# Altium PCB Mo04E_u2.PcbDoc
Units mm, origin at the board's own origin, x right, y up, seen from the top; angles counter-clockwise.
Board outline 91.2 x 38.05 mm, 2 copper layers (Top Layer, Bottom Layer); 55 components, 51 nets, 201 pads, 0 vias.
Unrouted connection lines stored in the file: 124.
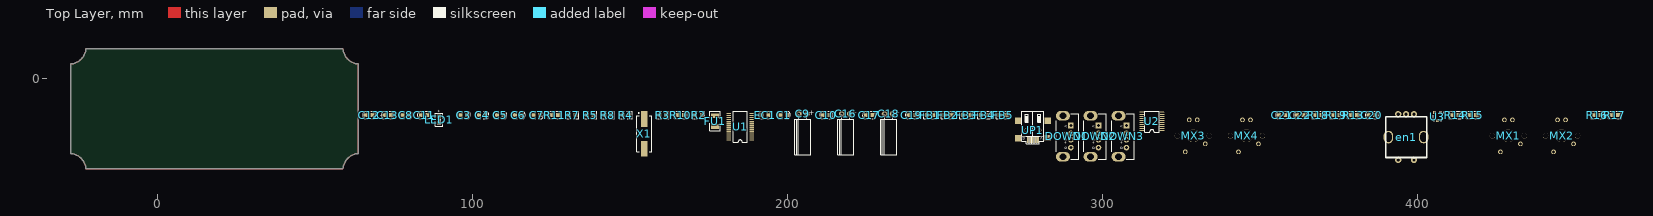
[diagram p0: Top Layer view]
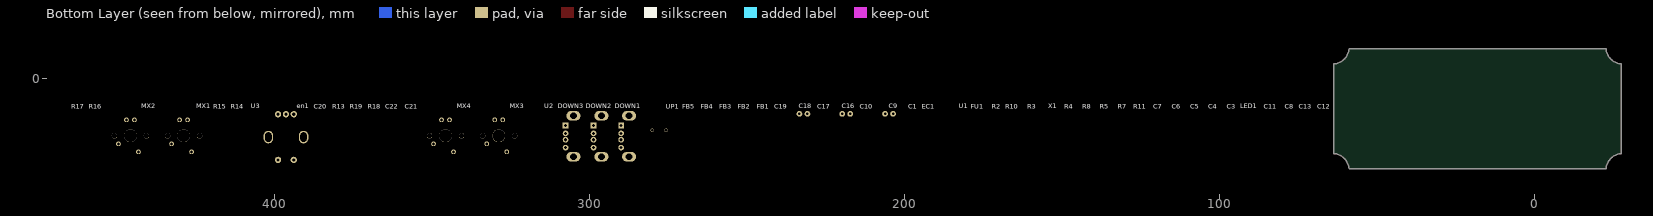
[diagram p1: Bottom Layer view, seen from below]

## Layer stack, top to bottom
Top Solder: solder mask 0.0102, Solder Resist, Dk 3.5
Top Layer: signal copper 0.0356
Dielectric 1: dielectric 0.32, FR-4, Dk 4.8
Bottom Layer: signal copper 0.0356
Bottom Solder: solder mask 0.0102, Solder Resist, Dk 3.5

## Board outline
-27.551,-23.745 -27.551,4.696 ccw(c-28.051,10.001) -22.746,9.501 58.845,9.501 ccw(c64.15,10.001) 63.65,4.696 63.65,-23.745 ccw(c64.15,-29.05) 58.845,-28.55 -22.746,-28.55 ccw(c-28.051,-29.05)

## Design rules (kind name [scope] priority, off if disabled: settings)
Clearance [All] p1: gap=0.254
PolygonConnect [All] p1: connectstyle=Relief reliefconductorwidth=0.254 reliefentries=4 polygonreliefangle="90 Angle" airgapwidth=0.254
RoomDefinition Sheet1 [InComponentClass('Sheet1')] p1: confinementstyle=ConfineIn formatcopy=TRUE lockcomponents=FALSE outline 64.754,-27.018 465.058,-27.018 465.058,-7.46 64.754,-7.46
RoutingVias [All] p1: holewidth=0.711 width=1.27 viastyle="Through Hole" minholewidth=0.711 minwidth=1.27 maxholewidth=0.711 maxwidth=1.27
SolderMaskExpansion [All] p1: expansion=0.102
Width [All] p1: maxlimit=0.254 minlimit=0.254 preferedwidth=0.254
30 further rules are at their usual default settings.

## Components (designator, comment, footprint, x,y, rotation, side; value= is the part's Value field where it differs from the comment)
C1 "100nf" C0805 200.009,-11.524 r180 top
C3 "0.1uF" C0805 98.409,-11.524 r180 top
C4 "0.1uF" C0805 104.251,-11.524 r180 top
C5 "0.1uF" C0805 109.966,-11.524 r180 top
C6 "0.1uF" C0805 115.808,-11.524 r180 top
C7 "0.1uF" C0805 121.65,-11.524 r180 top
C8 "0.1uF" C0805 79.994,-11.524 r180 top
C9 "100uf" "CAP-E 2.5MM-5X10" 206.232,-11.143 r180 top
C10 "0.1uf" C0805 213.598,-11.524 r180 top
C11 "0.1uF" C0805 85.836,-11.524 r180 top
C12 "20pF" C0805 68.437,-11.524 r180 top
C13 "20pF" C0805 74.279,-11.524 r180 top
C16 "100uf" "CAP-E 2.5MM-5X10" 219.821,-11.143 r180 top
C17 "0.1uf" C0805 227.187,-11.524 r180 top
C18 "100uf" "CAP-E 2.5MM-5X10" 233.41,-11.143 r180 top
C19 "0.1uf" C0805 240.776,-11.524 r180 top
C20 "0.1uF" C0805 386.826,-11.524 r180 top
C21 "0.1uF" C0805 358.378,-11.524 r180 top
C22 "0.1uF" C0805 364.093,-11.524 r180 top
DOWN1 "USB" USB-A/S_D 288.782,-18.255 r270 top
DOWN2 "USB" USB-A/S_D 297.545,-18.255 r270 top
DOWN3 "USB" USB-A/S_D 306.435,-18.255 r270 top
EC1 "10uf" C0805 194.167,-11.524 r180 top
en1 "encoder" "RES ADJ-EC12" 396.478,-18.509 r180 top
FB1 "" R0805 246.364,-11.524 r180 top
FB2 "" R0805 251.952,-11.524 r180 top
FB3 "" R0805 257.794,-11.524 r180 top
FB4 "" R0805 263.636,-11.524 r180 top
FB5 "" R0805 269.478,-11.524 r180 top
FU1 "6V/2A" FUSE-F1210 177.022,-13.429 r270 top
LED1 "" LED0805 89.392,-12.032 r270 top
MX1 "" MX_SW-5 428.99,-18.128 r180 top
MX2 "" MX_SW-5 445.881,-18.128 r180 top
MX3 "" MX_SW-5 328.914,-18.128 r180 top
MX4 "" MX_SW-5 345.805,-18.128 r180 top
R2 "10k" R0805 172.831,-11.524 r180 top
R3 "470" R0805 161.528,-11.524 r180 top
R4 "100" R0805 149.717,-11.524 r180 top
R5 "47k" R0805 138.414,-11.524 r180 top
R7 "680" R0805 132.699,-11.524 r180 top
R8 "510k" R0805 144.002,-11.524 r180 top
R10 "10k" R0805 167.243,-11.524 r180 top
R11 "20k" R0805 127.111,-11.524 r180 top
R13 "10k" R0805 380.984,-11.524 r180 top
R14 "10k" R0805 413.115,-11.524 r180 top
R15 "10k" R0805 418.703,-11.524 r180 top
R16 "331" R0805 458.2,-11.524 r180 top
R17 "331" R0805 463.788,-11.524 r180 top
R18 "331" R0805 369.681,-11.524 r180 top
R19 "331" R0805 375.396,-11.524 r180 top
U1 "GL850" SSOP28 185.023,-15.334 r180 top
U2 "stm32f042Fx" TSSOP20 319.008,-16.477 r180 top
U3 "XC6206" SOT23-3 406.511,-11.905 r180 top
UP1 "USB" USB-MINI 277.987,-15.207 r180 top
X1 "XTAL" "XTAL-49S SMD" 154.543,-17.493 r270 top

## Footprints (in the part's own frame and the unit in brackets; to place one, negate y for a bottom-side part, rotate by r counter-clockwise, add the part's x,y. Pads: shape width x height; smd on the part's side, far side on the other; paste and mask are expansions set on the pad)
C0805 [mil]
  rect 50x50 smd: 1(6,0) 2(88.7,-0.1)
  silkscreen extent -36,-45 131,45, body extent 8,-24 87,25, height 30
"CAP-E 2.5MM-5X10" [mm]
  round 1.8 hole 0.8: 1(0,0) 2(2.54,0)
  silkscreen extent -1.27,0.25 3.81,12.95, body extent -1.23,0 3.77,13, height 5.25
FUSE-F1210 [mil]
  rect 60x100 smd: 1(-67.5,0) 2(67.5,0)
  silkscreen extent -122,-66 123,66, body extent -64,-51 63,51, height 27
LED0805 [mm] "1/8W"
  rect 1.27x1.27 smd: 1(0,0) 2(2.09,0.005)
  silkscreen extent -1.01,-1.14 3.1,1.15, body extent 0.05,-0.64 2.03,0.64, height 0.5
MX_SW-5 [mm] "with Fixation pins  1-Pole w/LED"
  round 1.5 hole 0.9: 1(-3.81,2.54) 2(2.54,5.08) 3(-1.27,-5.08) 4(1.27,-5.08)
  round 1.702 hole 1.702: ""(-5.08,0) ""(5.08,0)
  round 4.064 hole 4.064: ""(0,0)
  body extent -7.8,-7.95 7.8,7.96, height 14.9
R0805 [mm] "1/8W"
  rect 1.27x1.27 smd: 1(0,0) 2(2.09,0.005)
  silkscreen extent -1.01,-1.14 3.1,1.15, body extent 0.04,-0.62 2.04,0.64, height 0.55
"RES ADJ-EC12" [mm] "编码器"
  oval 3x4 hole 2 slot 3 at 90 deg: 0(-5.588,0.014) 0(5.588,0.014)
  round 2 hole 1: 1(-2.525,-7.25) 2(-0.025,-7.25) 3(2.475,-7.25) 4(-2.525,7.25) 5(2.475,7.25)
  silkscreen extent -6.54,-6.46 6.49,6.49, body extent -7,-7.5 7,6.75, height 20.05
SOT23-3 [mm]
  rect 1x1 smd: 1(-0.889,-1.143) 2(1.011,-1.143) 3(0.061,1.357)
  silkscreen extent -2.01,-1.27 1.36,1.36, body extent -1.39,-1.29 1.51,1.51, height 1.2
SSOP28 [mil]
  rect 55x15.75 smd: 1(-142.95,162.5) 2(-142.95,136.92) 3(-142.95,111.34) 4(-142.95,85.77) 5(-142.95,60.19) 6(-142.95,34.61) 7(-142.95,9.04) 8(-142.95,-16.54) 9(-142.95,-42.12) 10(-142.95,-67.69) 11(-142.95,-93.27) 12(-142.95,-118.85) 13(-142.95,-144.42) 14(-143,-170) 15(142.95,-170) 16(142.95,-144.42) 17(142.95,-118.85) 18(142.95,-93.27) 19(142.95,-67.69) 20(142.95,-42.12) 21(142.95,-16.54) 22(142.95,9.04) 23(142.95,34.62) 24(142.95,60.19) 25(142.95,85.77) 26(142.95,111.35) 27(142.95,136.92) 28(142.95,162.5)
  silkscreen extent -90,-199 90,192, body extent -134,-197 126,189, height 41
TSSOP20 [mm]
  rect 1.5x0.3 smd: 1(0,0)
  oval 1.5x0.3 smd: 2(0,-0.65) 3(0,-1.3) 4(0,-1.95) 5(0,-2.6) 6(0,-3.25) 7(0,-3.9) 8(0,-4.55) 9(0,-5.2) 10(0,-5.85) 11(6.454,-5.85) 12(6.454,-5.2) 13(6.454,-4.55) 14(6.454,-3.9) 15(6.454,-3.25) 16(6.454,-2.6) 17(6.454,-1.95) 18(6.454,-1.3) 19(6.454,-0.65) 20(6.454,0)
  silkscreen extent 0.97,-6.2 5.49,0.51, body extent -0.05,-6.22 6.5,0.38, height 1.2
USB-A/S_D [mm] "A型直插母头，"
  rect 1.8x1.8 hole 1: 1(-3.4,1.25)
  round 1.8 hole 1: 2(-0.9,1.25) 3(1.1,1.25) 4(3.6,1.25)
  oval 3x4.5 hole 2.2: 4(-6.5,-1.25) 4(6.5,-1.25)
  silkscreen extent -7.1,-3.35 7.3,3.75, body extent -7.11,-3.35 7.29,3.75, height 14
USB-MINI [mm]
  rect 2x2 smd: 0(-4.746,3.612) 0(-4.746,-1.872)
  round 1 hole 0.8: 0(-2.2,1.128) 0(2.2,1.128)
  rect 2x2.032 smd: 0(4.746,3.628) 0(4.746,-1.872)
  rect 0.52x2 smd: 1(-1.626,4.166) 2(-0.813,4.166) 3(0,4.166) 4(0.813,4.166) 5(1.626,4.166)
  silkscreen extent -3.5,-4.87 3.5,5.38, body extent -5.32,-4.63 5.38,4.57, height 3.95
"XTAL-49S SMD" [mm]
  rect 5x2 smd: 1(-4.75,0) 2(4.75,0)
  silkscreen extent -6.75,-2.4 5.7,2.4, body extent -6.7,-2.46 6.7,2.44, height 4

## Part data
C1 EC1: library part CAP, "Capacitor"
C3 C4 C5 C6 C7 C8 C10 C11 C12 C13 C17 C19 C20 C21 C22: library part CAP
C9 C16 C18: library part 电解电容, "Capacitor"
DOWN1 DOWN2 DOWN3 UP1: "4 Pin Header"
FB1 FB2 FB3 FB4 FB5 R8 R10 R11 R16 R17 R18 R19: library part R
FU1: library part FUSE
LED1: library part LED
MX1 MX2 MX3 MX4: library part MX_SW-7
R2 R3 R4 R5 R7 R13 R14 R15: library part RES
X1: "12M"

## Nets (pads, with @x,y where several pads share a name; then routed paths per layer and width w, separated by ;. In a path a pad name is that pad's centre, name@x,y a point inside that pad or via, vN(x,y) a via of type N, cw(c..) or ccw(c..) an arc to the next point about the centre after c; other vN are vias at no path point)
3V3: C20.1 R14.2 R15.2 U2.5 U2.16 U3.2
8: en1.1 R14.1
9: en1.3 R15.1
AVDD1: C1.2 C3.1 C4.1 C5.1 C6.1 C7.1 FB1.2 U1.1 U1.5 U1.10
B_VCC: FB2.1 FU1.1 R2.2 R8.1 U1.23
BL: MX1.1 U2.1
DM0: U1.25 UP1.2
DM1: DOWN1.2 U1.27
DM2: DOWN2.2 U1.2
DM3: DOWN3.2 U1.8 U2.17
DM4: U1.11
DP0: U1.26 UP1.3
DP1: DOWN1.3 U1.28
DP2: DOWN2.3 U1.3
DP3: DOWN3.3 U1.9 U2.18
DP4: U1.12
DVDD: C8.1 EC1.2 FB1.1 R3.2 R4.2 U1.16 U1.24
GND: C1.1 C3.2 C4.2 C5.2 C6.2 C7.2 C8.2 C9.2 C10.2 C11.2 C12.1 C13.1 C16.2 C17.2 C18.2 C19.2 C20.2 C21.1 C22.1 DOWN1.4 DOWN2.4 DOWN3.4 EC1.1 en1.2 en1.5 MX1.2 MX2.2 MX3.2 MX4.2 R5.2 R7.1 R11.1 R16.2 R17.2 R18.2 R19.2 U1.15 U2.15 U3.1 UP1.5
NetC10_1: C10.1 DOWN1.1 FB3.2
NetC17_1: C17.1 DOWN2.1 FB4.2
NetC21_2: C21.2 R13.1 U2.4
NetC22_2: C22.2 R13.2
NetFB2_2: FB2.2 UP1.1
NetLED1_A: R3.1
NetMX1_4: MX1.4 R16.1
NetMX2_4: MX2.4 R17.1
NetMX3_4: MX3.4 R18.1
NetMX4_4: MX4.4 R19.1
OVCUR1#: R10.1 R11.2 U1.21
PA0: MX2.1 U2.6
PA1: MX3.1 U2.7
PA2: MX4.1 U2.8
PA3: en1.4 U2.9
PA4: U2.10
PA5: MX2.3 U2.11
PA6: MX3.3 U2.12
PA7: MX4.3 U2.13
PB1: MX1.3 U2.14
PF0: U2.2
PF1: U2.3
PGANG: R4.1 U1.18
PSELF: R8.2 U1.17
RESER#: C11.1 R2.1 R5.1 U1.13
RREF: R7.2 U1.4
SWC: U2.20
SWD: U2.19
TEST: U1.14
VDP1: C9.1 C16.1 C18.1 FB3.1 FB4.1 FB5.1 FU1.2 R10.2
VU_IN: C19.1 DOWN3.1 FB5.2 U3.3
XTAL1: C12.2 U1.6 X1.1
XTAL2: C13.2 U1.7 X1.2
pads on no net: en1.0 LED1.1 LED1.2 MX1. MX2. MX3. MX4. U1.19 U1.20 U1.22 UP1.0 UP1.4
copper on no net: | length 167.9
  Top Layer w0.254: -27.551,4.696 -27.551,-23.745 cw(c-28.051,-29.05) -22.746,-28.55 58.845,-28.55 cw(c64.15,-29.05) 63.65,-23.745 63.65,4.696 ; -27.551,4.696 ccw(c-28.051,10.001) -22.746,9.501 ; 58.845,9.501 ccw(c64.15,10.001) 63.65,4.696

## Text inside footprints (layer, text, board x,y; h text height)
C9: Top Overlay "+" at 208.629,-10.228 h1.75 r180
C16: Top Overlay "+" at 222.218,-10.228 h1.75 r180
C18: Top Overlay "+" at 235.807,-10.228 h1.75 r180
DOWN1: Top Overlay "V" at 288.025,-14.743 h0.76 r270; Top Overlay "G" at 288.025,-21.626 h0.76 r270; Top Overlay "D+" at 288,-19.035 h0.76 r270; Top Overlay "D-" at 288.051,-16.851 h0.76 r270
DOWN2: Top Overlay "V" at 296.788,-14.743 h0.76 r270; Top Overlay "G" at 296.788,-21.626 h0.76 r270; Top Overlay "D+" at 296.763,-19.035 h0.76 r270; Top Overlay "D-" at 296.814,-16.851 h0.76 r270
DOWN3: Top Overlay "V" at 305.678,-14.743 h0.76 r270; Top Overlay "G" at 305.678,-21.626 h0.76 r270; Top Overlay "D+" at 305.653,-19.035 h0.76 r270; Top Overlay "D-" at 305.704,-16.851 h0.76 r270
LED1: Top Overlay "+" at 88.909,-10.787 h0.76 r270
UP1: Top Overlay "V" at 281.035,-18.636 h0.76 r180; Top Overlay "G" at 275.472,-18.636 h0.76 r180